# Altium PCB PCB1.PcbDoc
Units mil, origin at the board's own origin, x right, y up, seen from the top; angles counter-clockwise.
Board outline 6000 x 4000 mil, 2 copper layers (Top Layer, Bottom Layer); 7 components, 0 nets, 196 pads, 0 vias.
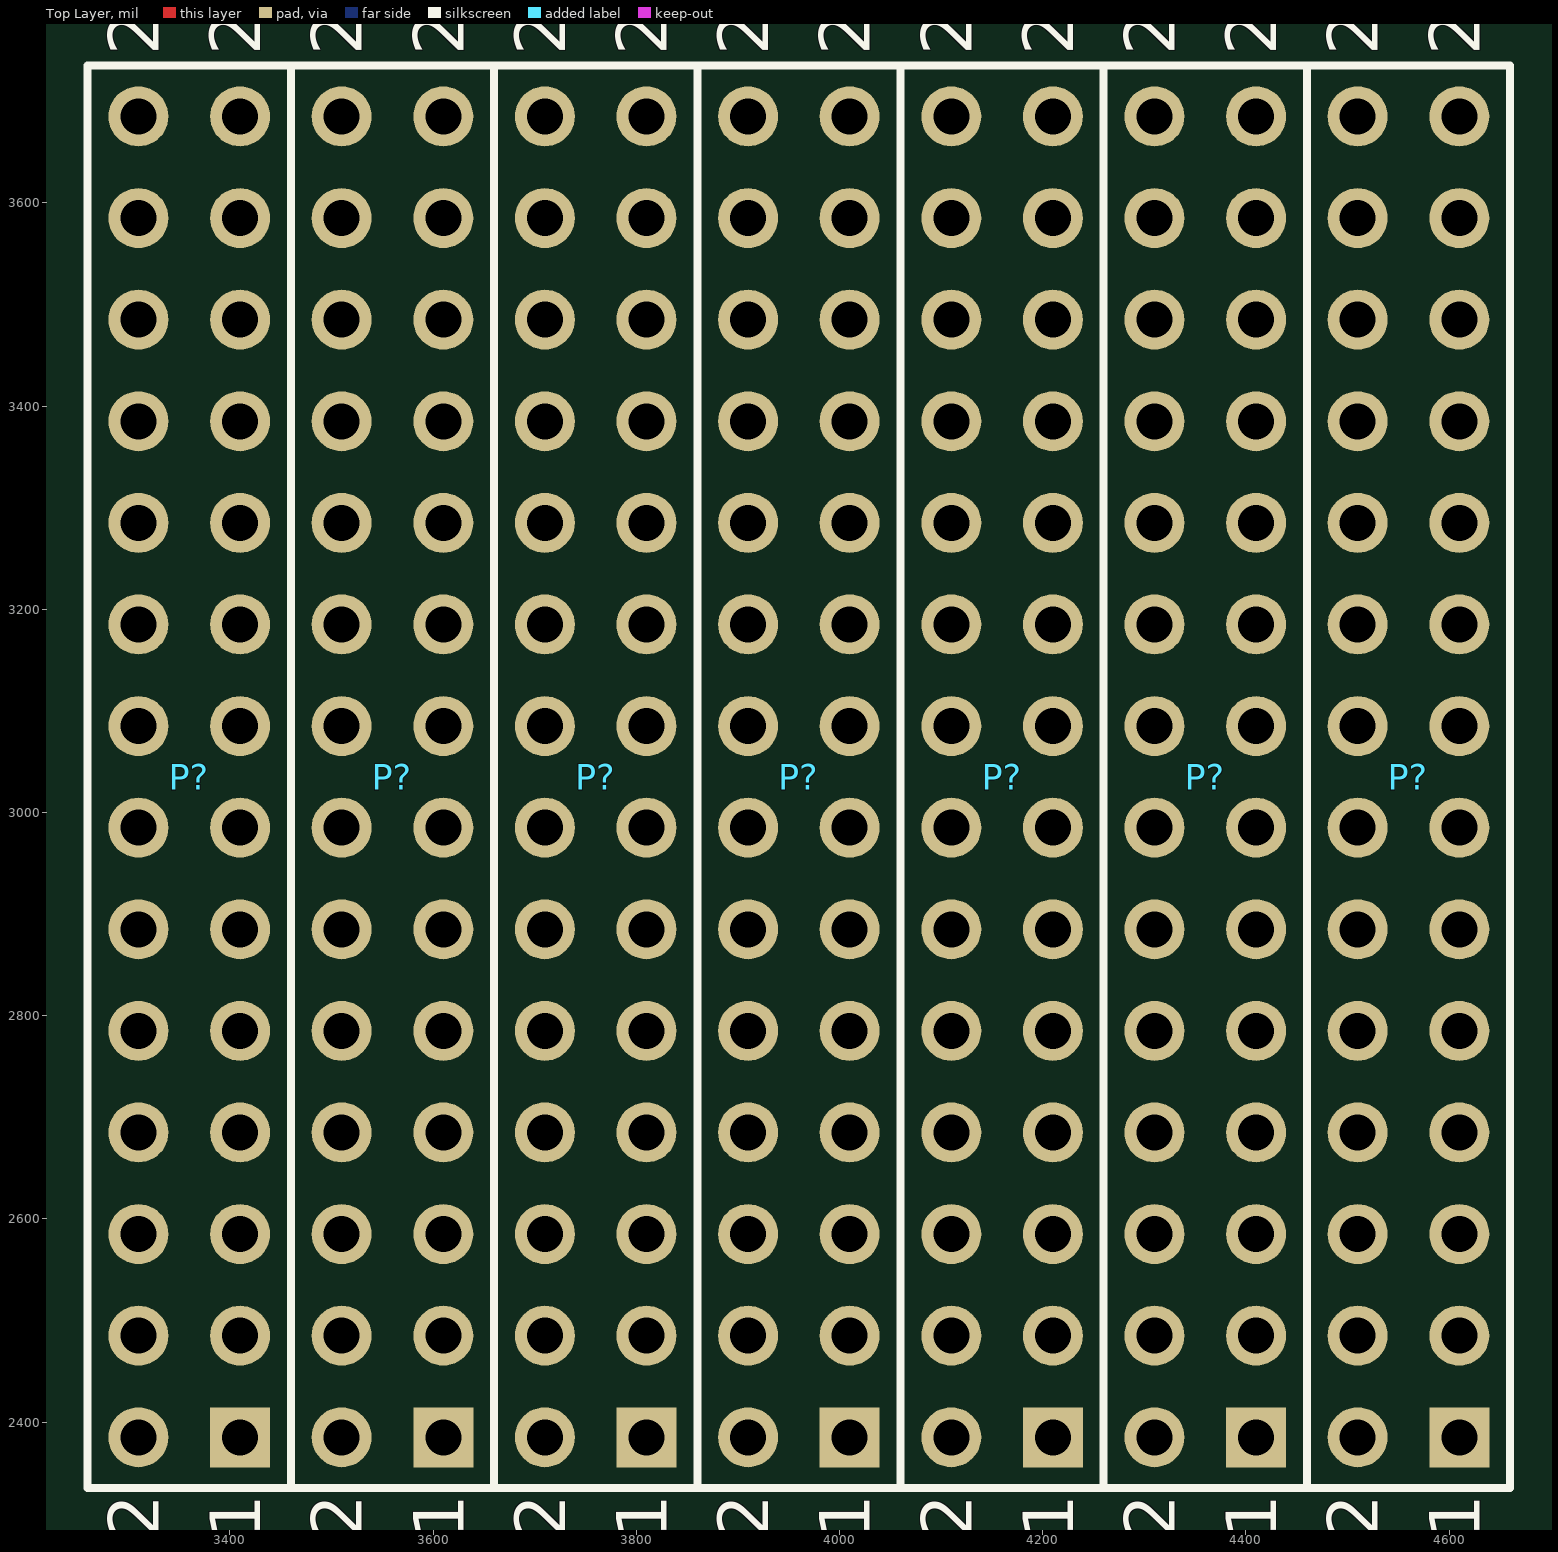
[diagram p0: Top Layer view]
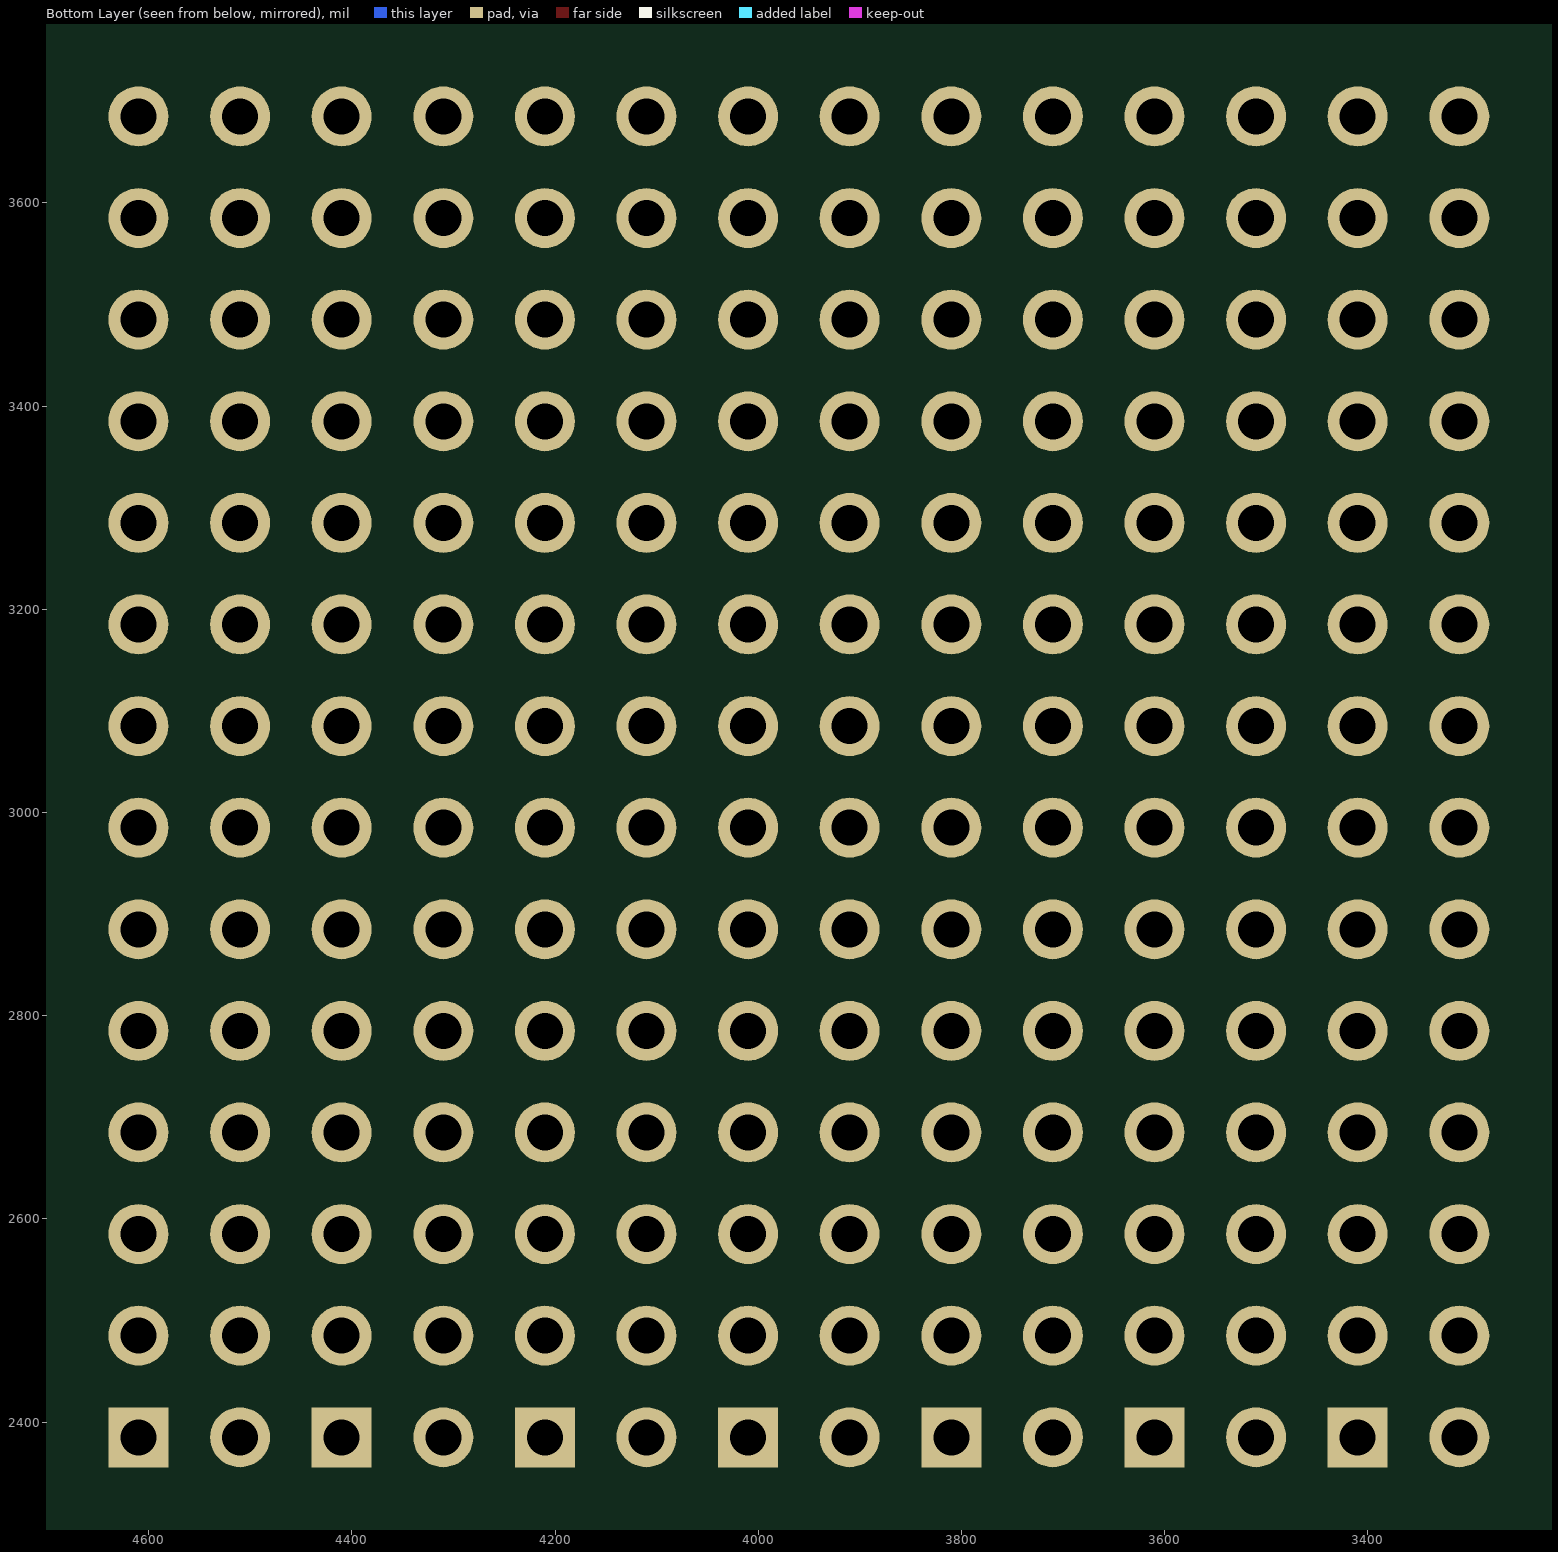
[diagram p1: Bottom Layer view, seen from below]

## Layer stack, top to bottom
Top Solder: solder mask 0.4, Solder Resist, Dk 3.5
Top Layer: signal copper 1.4
Dielectric 1: dielectric 12.6, FR-4, Dk 4.8
Bottom Layer: signal copper 1.4
Bottom Solder: solder mask 0.4, Solder Resist, Dk 3.5

## Board outline
1000,1000 7000,1000 7000,5000 1000,5000

## Design rules (kind name [scope] priority, off if disabled: settings)
Clearance [All] p1: gap=10 ignorepadtopadclearanceinfootprint=FALSE except(0: Arc-Hole Track-Hole SMDPad-Hole THPad-Hole Via-Hole Fill-Hole Poly-Hole Region-Hole Text-Hole)
PolygonConnect [All] p1: connectstyle=Relief reliefconductorwidth=10 reliefentries=4 polygonreliefangle="90 Angle" airgapwidth=10
RoomDefinition Sheet1 [InComponentClass('Sheet1')] p1: confinementstyle=ConfineIn formatcopy=TRUE lockcomponents=FALSE outline 3225,2300 4700,2300 4700,3765 3225,3765
RoutingVias [All] p1: holewidth=28 width=50 viastyle="Through Hole" minholewidth=28 minwidth=50 maxholewidth=28 maxwidth=50
SolderMaskExpansion [All] p1: expansion=4
Width [All] p1: maxlimit=10 minlimit=10 preferedwidth=10
30 further rules are at their usual default settings.

## Classes and differential pairs
component class Sheet1: P?

## Components (designator, comment, footprint, x,y, rotation, side; value= is the part's Value field where it differs from the comment)
P? "Header 14X2" HDR2X14 3610,2385 r90 top
P? "Header 14X2" HDR2X14 3410,2385 r90 top
P? "Header 14X2" HDR2X14 3810,2385 r90 top
P? "Header 14X2" HDR2X14 4610,2385 r90 top
P? "Header 14X2" HDR2X14 4410,2385 r90 top
P? "Header 14X2" HDR2X14 4010,2385 r90 top
P? "Header 14X2" HDR2X14 4210,2385 r90 top

## Footprints (in the part's own frame and the unit in brackets; to place one, negate y for a bottom-side part, rotate by r counter-clockwise, add the part's x,y. Pads: shape width x height; smd on the part's side, far side on the other; paste and mask are expansions set on the pad)
HDR2X14 [mm] "Connector; Header; 14x2 Position"
  rect 1.5x1.5 hole 0.9: 1(0,0)
  round 1.5 hole 0.9: 2(0,2.54) 3(2.54,0) 4(2.54,2.54) 5(5.08,0) 6(5.08,2.54) 7(7.62,0) 8(7.62,2.54) 9(10.16,0) 10(10.16,2.54) 11(12.7,0) 12(12.7,2.54) 13(15.24,0) 14(15.24,2.54) 15(17.78,0) 16(17.78,2.54) 17(20.32,0) 18(20.32,2.54) 19(22.86,0) 20(22.86,2.54) 21(25.4,0) 22(25.4,2.54) 23(27.94,0) 24(27.94,2.54) 25(30.48,0) 26(30.48,2.54) 27(33.02,0) 28(33.02,2.54)
  silkscreen extent -1.27,-1.27 34.29,3.81

## Part data
P? P? P? P? P? P? P?: "Header, 14-Pin, Dual row", LatestRevisionDate=17-Jul-2002, LatestRevisionNote="Re-released for DXP Platform.", Publisher="Altium Limited"

## Nets (pads, with @x,y where several pads share a name; then routed paths per layer and width w, separated by ;. In a path a pad name is that pad's centre, name@x,y a point inside that pad or via, vN(x,y) a via of type N, cw(c..) or ccw(c..) an arc to the next point about the centre after c; other vN are vias at no path point)
pads on no net: P?.1 P?.2 P?.3 P?.4 P?.5 P?.6 P?.7 P?.8 P?.9 P?.10 P?.11 P?.12 P?.13 P?.14 P?.15 P?.16 P?.17 P?.18 P?.19 P?.20 P?.21 P?.22 P?.23 P?.24 P?.25 P?.26 P?.27 P?.28

## Silkscreen, mask and mechanical layers (free items; w line width, h text height)
Mechanical 1:
  lines w10: 3225,2355 3225,3720 3265,3760 4655,3760 4695,3720 4695,2345 4660,2310 3270,2310 3225,2355

## Text inside footprints (layer, text, board x,y; h text height)
P?: Top Overlay "2" at 3530,2285 h50 r90; Top Overlay "1" at 3630,2285 h50 r90; Top Overlay "27" at 3630,3745 h50 r90; Top Overlay "28" at 3530,3745 h50 r90
P?: Top Overlay "2" at 3330,2285 h50 r90; Top Overlay "1" at 3430,2285 h50 r90; Top Overlay "27" at 3430,3745 h50 r90; Top Overlay "28" at 3330,3745 h50 r90
P?: Top Overlay "2" at 4130,2285 h50 r90; Top Overlay "1" at 4230,2285 h50 r90; Top Overlay "27" at 4230,3745 h50 r90; Top Overlay "28" at 4130,3745 h50 r90
P?: Top Overlay "2" at 3930,2285 h50 r90; Top Overlay "1" at 4030,2285 h50 r90; Top Overlay "27" at 4030,3745 h50 r90; Top Overlay "28" at 3930,3745 h50 r90
P?: Top Overlay "2" at 3730,2285 h50 r90; Top Overlay "1" at 3830,2285 h50 r90; Top Overlay "27" at 3830,3745 h50 r90; Top Overlay "28" at 3730,3745 h50 r90
P?: Top Overlay "2" at 4330,2285 h50 r90; Top Overlay "1" at 4430,2285 h50 r90; Top Overlay "27" at 4430,3745 h50 r90; Top Overlay "28" at 4330,3745 h50 r90
P?: Top Overlay "2" at 4530,2285 h50 r90; Top Overlay "1" at 4630,2285 h50 r90; Top Overlay "27" at 4630,3745 h50 r90; Top Overlay "28" at 4530,3745 h50 r90